# Altium PCB ESP_layout_3.1_saved.PcbDoc
Units mil, origin at the board's own origin, x right, y up, seen from the top; angles counter-clockwise.
Board outline 3400 x 3000 mil, 4 copper layers (SIG1, GND_PLANE, PWR, SIG2), stack 60.456 mil thick; 43 components, 28 nets, 185 pads, 11 vias.
Unrouted connection lines stored in the file: 100.
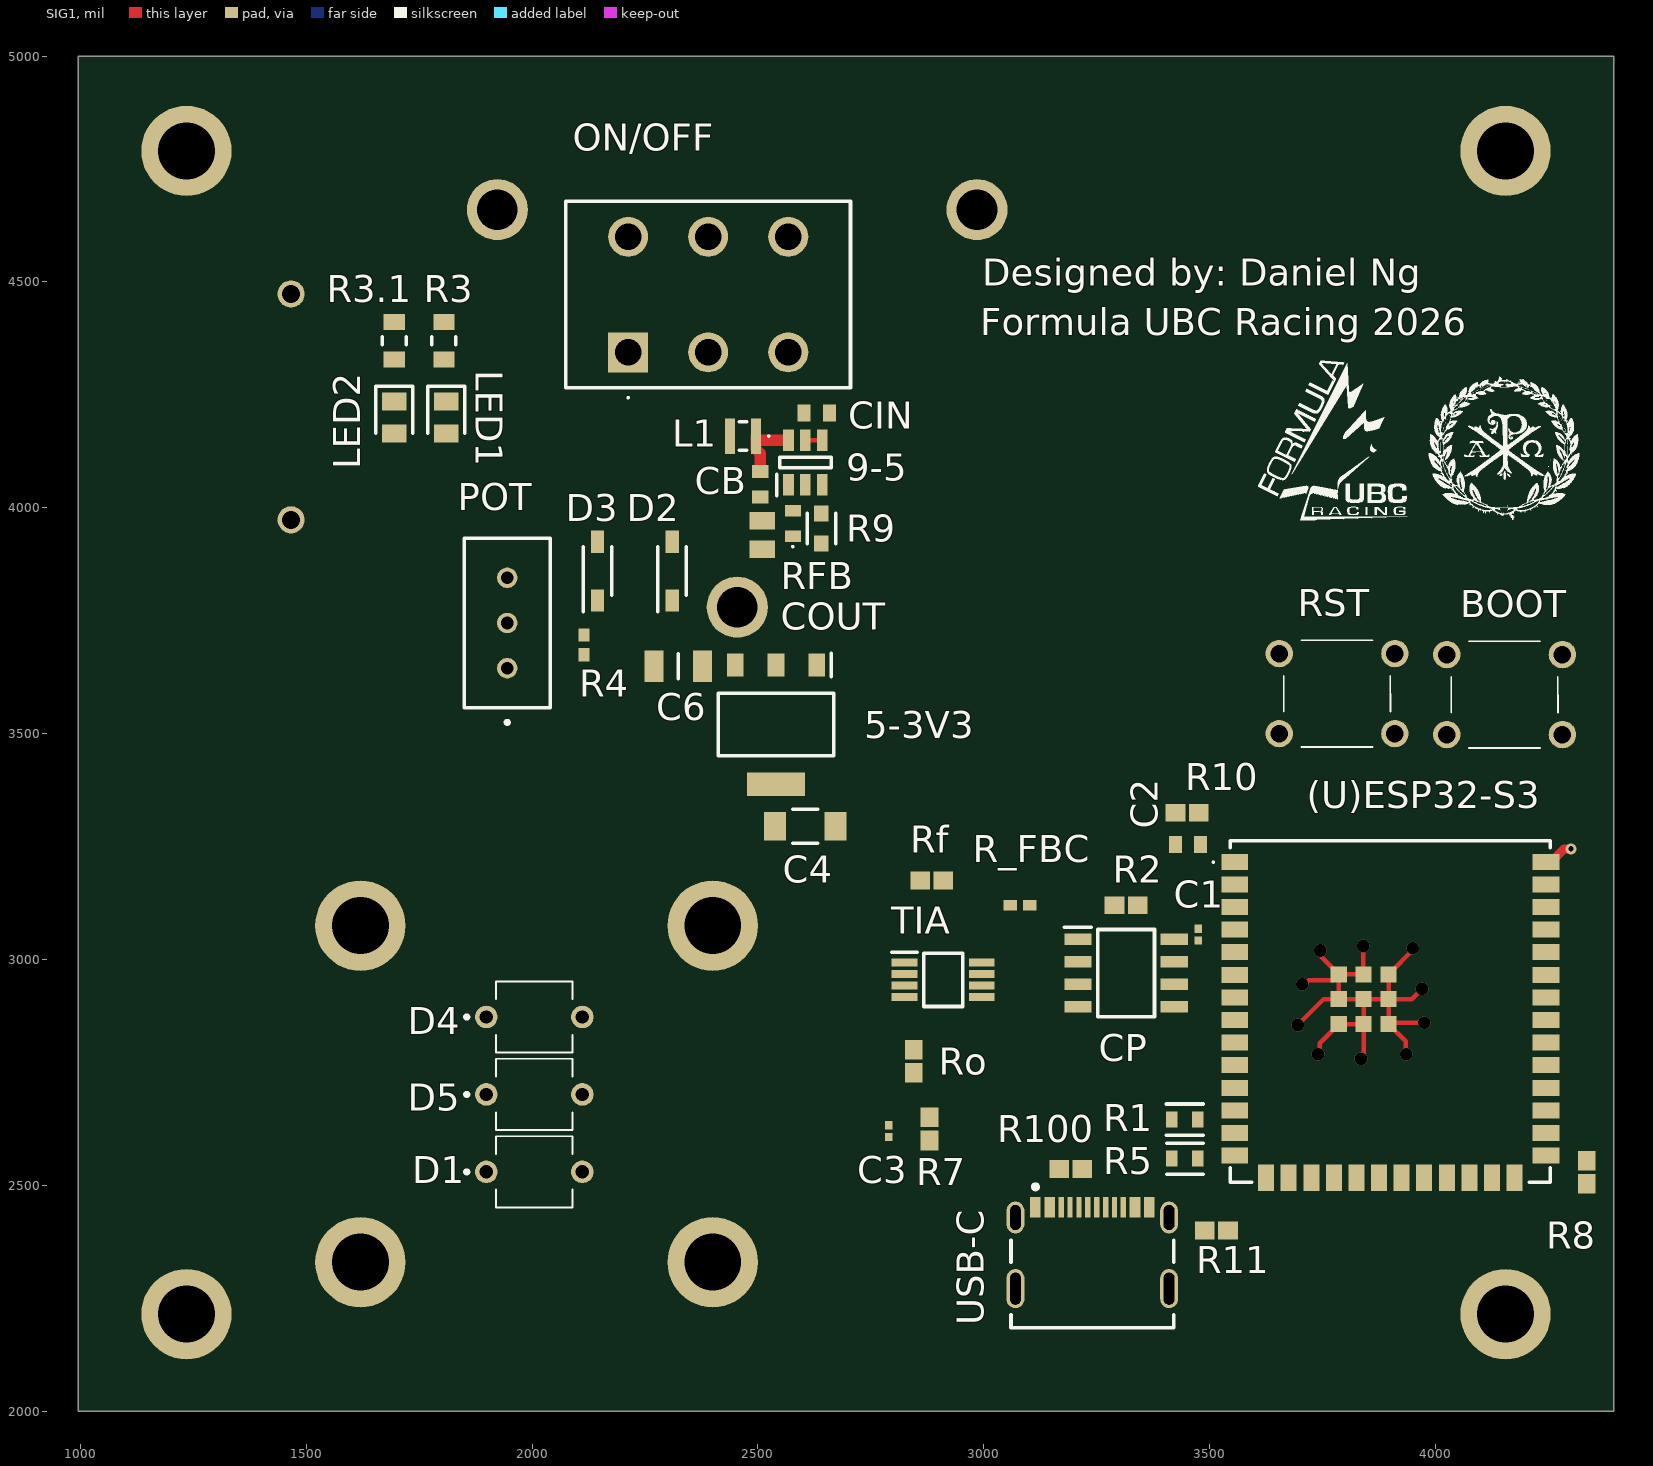
[diagram p0: SIG1 view]
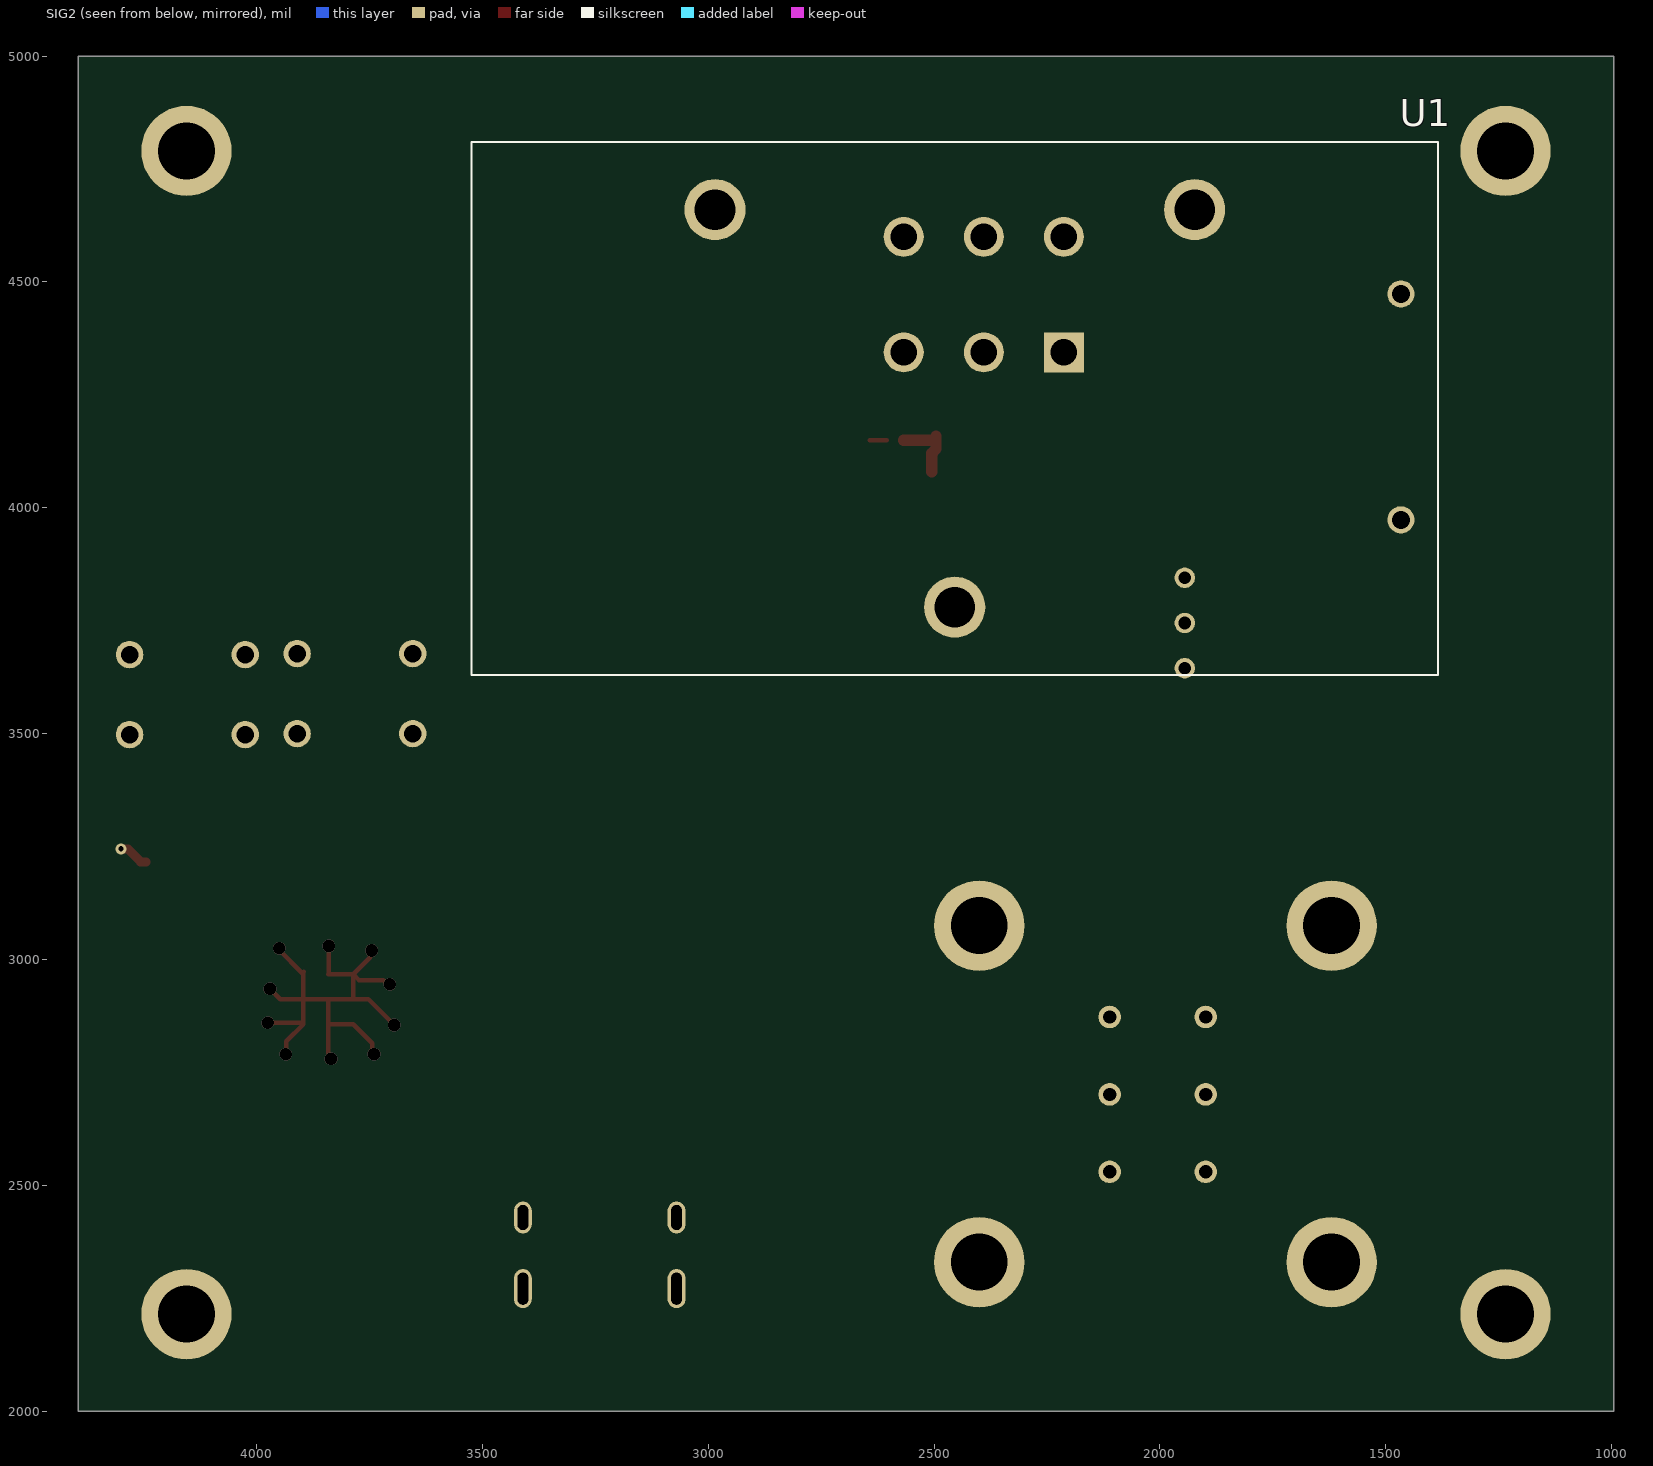
[diagram p1: SIG2 view, seen from below]
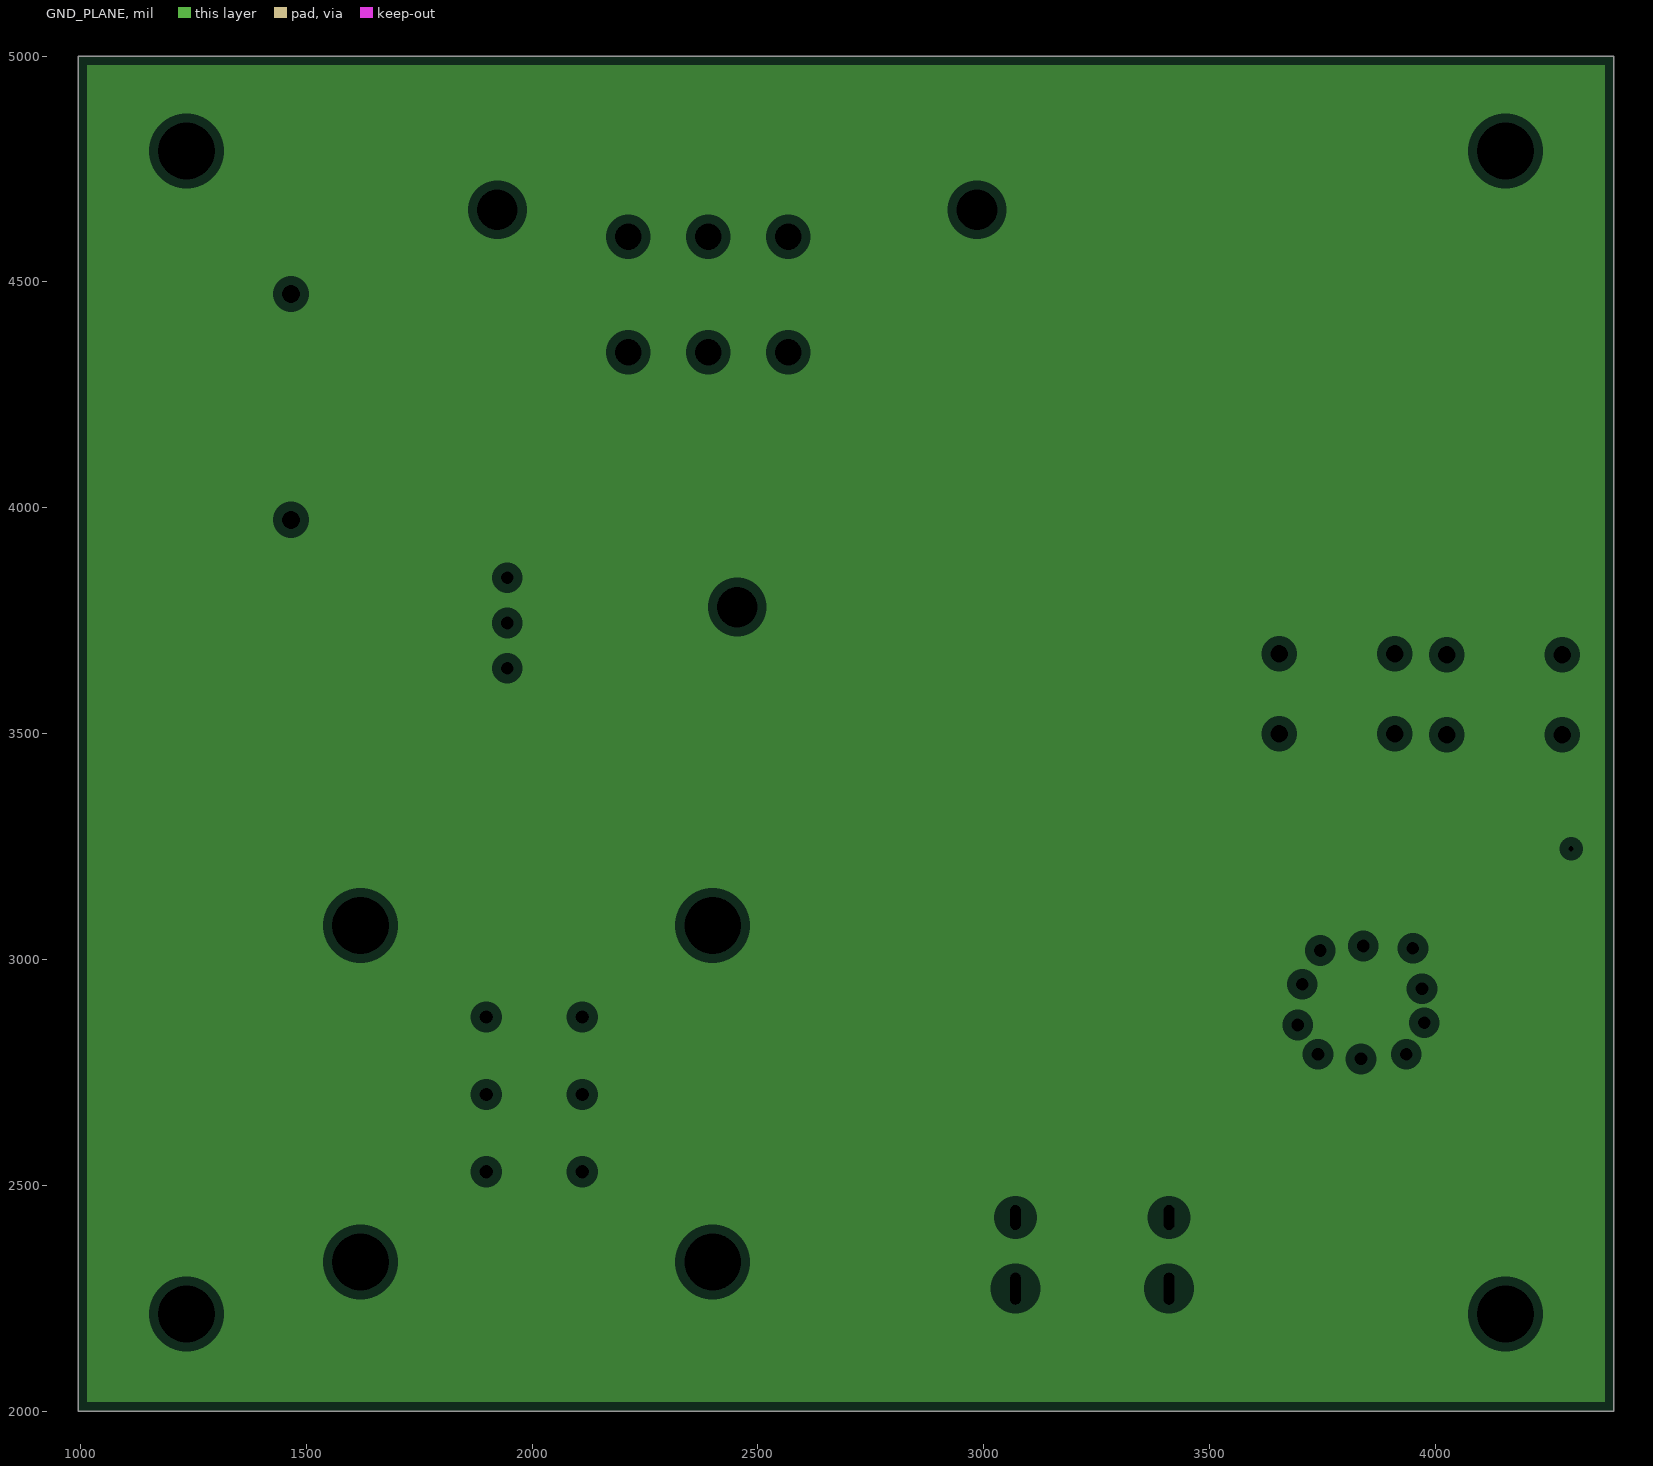
[diagram p2: GND_PLANE, clearances drawn from the general rule]
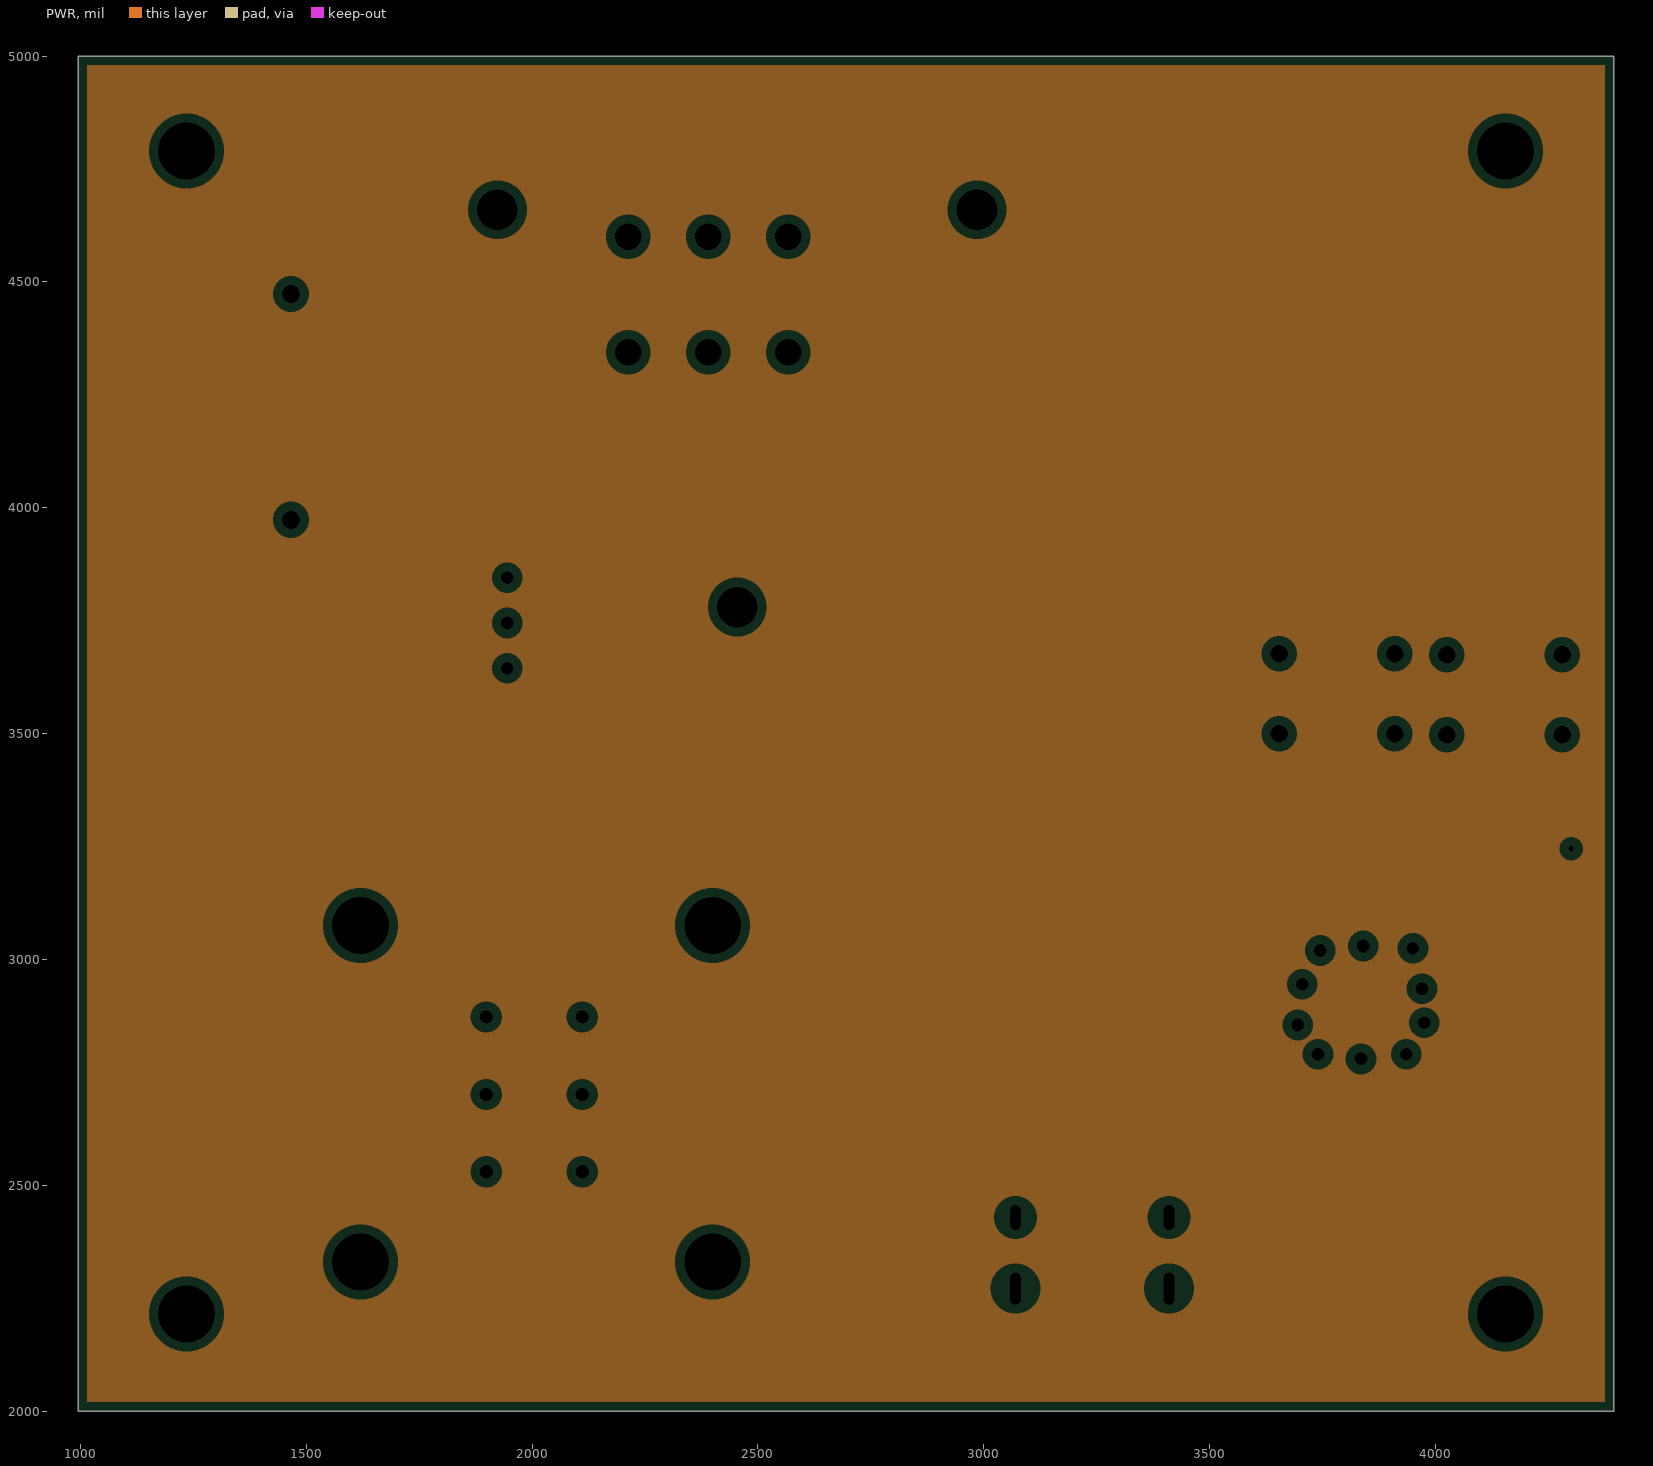
[diagram p3: PWR, clearances drawn from the general rule]

## Layer stack, top to bottom
Top Solder: solder mask 0.4, Solder Resist, Dk 3.5
SIG1: signal copper 1.4
Dielectric 2: prepreg 4.2, PP-006, Dk 4.1
GND_PLANE: plane copper 1.378, net GND
Dielectric 1: core 46.5, FR-4, Dk 4.8
PWR: plane copper 1.378, net 3V3
Dielectric 3: prepreg 4.2, PP-006, Dk 4.1
SIG2: signal copper 1.4
Bottom Solder: solder mask 0.4, Solder Resist, Dk 3.5

## Board outline
995,2000 4395,2000 4395,5000 995,5000

## Design rules (kind name [scope] priority, off if disabled: settings)
Clearance [All] p1: gap=6 ignorepadtopadclearanceinfootprint=FALSE
DiffPairsRouting [All] p1: maxlimit=10 minlimit=10 mostfreqgap=10 toplayer_minwidth=15 toplayer_maxwidth=15 toplayer_prefwidth=15 bottomlayer_minwidth=15 bottomlayer_maxwidth=15 bottomlayer_prefwidth=15 maxuncoupledlength=500
PlaneClearance [All] p1: clearance=20
PlaneConnect [All] p1: planeconnectstyle=Relief reliefexpansion=20 reliefentries=4 reliefconductorwidth=10 reliefairgap=10
PolygonConnect [All] p1: connectstyle=Relief reliefconductorwidth=10 reliefentries=4 polygonreliefangle="90 Angle" airgapwidth=10
RoutingVias [All] p1: holewidth=28 width=50 viastyle="Through Hole" minholewidth=28 minwidth=50 maxholewidth=28 maxwidth=50
SolderMaskExpansion [All] p1: expansion=0 istentingtop=FALSE
SupplyNets "Schematic Supply Nets_7" [InNet('3V3')] p1: voltage=0.000
SupplyNets "Schematic Supply Nets_6" [InNet('9V')] p2: voltage=0.000
SupplyNets "Schematic Supply Nets_5" [InNet('5V_USB')] p3: voltage=0.000
SupplyNets "Schematic Supply Nets_4" [InNet('GND')] p4: voltage=0.000
SupplyNets "Schematic Supply Nets_2" [InNet('5V')] p5: voltage=0.000
SupplyNets "Schematic Supply Nets_1" [InNet('5V_BUCK')] p6: voltage=0.000
SupplyNets "Schematic Supply Nets" [InNet('VBAT')] p7: voltage=0.000
Width [All] p1: maxlimit=10 minlimit=10 preferedwidth=10
27 further rules are at their usual default settings.

## Classes and differential pairs
component class Receiver: C1 C3 CP D1 D4 D5 POT R2 R4 R7 R_FBC Rf Ro TIA
component class Power: 5-3V3 9-5 C4 C6 CB CIN COUT D2 D3 L1 ON/OFF R9 RFB U1
component class ESP: (U)ESP32-S3 BOOT C2 LED1 LED2 R1 R3 R3.1 R5 R8 R10 R11 R100 RST USB-C
differential pair USB: +USB_P -USB_N

## Components (designator, comment, footprint, x,y, rotation, side; value= is the part's Value field where it differs from the comment)
5-3V3 "AMS1117-3.3" SOT229P700X180-4N 2540,3520 r270 top (schematic designator 1)
9-5 "LMR50410Y5FQDBVRQ1" SOT95P280X145-6N 2605,4100 r90 top
(U)ESP32-S3 "ESP32-S3-WROOM-1U-N8R8" ESP32S3WROOM1UN8R8 3900,2885 r0 top
BOOT "BOOT" 18259106 4280.91,3497.83 r180 top
C1 "0.1uF" CAPC0603X33N 3475,3055 r90 top
C2 "1uF" CAPC1608X90N 3452.01,3254.48 r180 top
C3 "0.1uF" CAPC0603X33N 2790,2620 r90 top
C4 "22uF" FP-1206-L_3_2_0_3-W_1_6_0-MFG 2605,3295 r0 top
C6 "10uF" CAPC3216X180N 2323.43,3649.44 r0 top
CB "0.1uF" CAPC1608X90N 2505,4052.05 r90 top
CIN "2.2uF" CAPC1608X90N 2630,4210 r0 top
COUT "10uF" CAPC2012X140N 2510,3940 r270 top
CP "LM393DR2GH" SOIC127P600X175-8N 3315,2970 r0 top
D1 "BPW34" BPW34 2005,2530 r0 top
D2 "B5819W" SOD3716X125N 2310,3860 r90 top
D3 "B5819W" SOD3716X125N 2145,3860 r90 top
D4 "BPW34" BPW34 2005,2872.83 r0 top
D5 "BPW34" BPW34 2005,2701.42 r0 top
L1 "4.7uH" 621767970 2467.05,4158.75 r180 top
LED1 "LTST-C170GKT" LEDC2012X120N 1810,4200 r270 top
LED2 "LTST-C170GKT" LEDC2012X120N 1695,4200 r270 top
ON/OFF "SLW-1678105-6A-N-D" SLW16781056AND 2212.83,4344.09 r0 top
POT "3296W-1-104LF" 3296W1503LF 1945,3645 r270 top
R1 "ERJ-3GEY0R00V" FP-ERJ-3GEY0R00V-MFG 3445,2645.75 r0 top value=0Ω
R2 "10k" RESC1608X55N 3315,3120 r0 top
R3 "330R" FP-AC0805-MFG 1805,4370 r270 top value=330Ω
R3.1 "330R" FP-AC0805-MFG 1695,4370 r270 top value=330Ω
R4 "100k" RESC1005X40N 2115,3696.65 r270 top
R5 "ERJ-3GEY0R00V" FP-ERJ-3GEY0R00V-MFG 3445.12,2558.98 r0 top value=0Ω
R7 "10k" RESC1608X55N 2880,2625 r90 top
R8 "10kΩ" RESC1608X55N 4335,2529.41 r270 top
R9 "22.1kΩ" FP-RT0603-MFG 2640.32,3954.17 r90 top value=22.1KΩ
R10 "10kΩ" RESC1608X55N 3450,3325 r180 top
R11 "5.1kΩ" RESC1608X55N 3515,2400 r0 top
R100 "5.1kΩ" RESC1608X55N 3192.39,2536.3 r180 top
R_FBC "100k" RESC1005X40N 3080,3120 r180 top
Rf "10k" RESC1608X55N 2885,3175 r0 top
RFB "88.7kΩ" ERA3AEB101V 2577.17,3965.18 r90 top
Ro "10k" RESC1608X55N 2845,2775 r90 top
RST "RST" 18259106 3654.09,3677.17 r0 top
TIA "OPA380AIDGKR" SOP65P490X110-8N 2910,2955 r0 top
U1 "BH9VPC" BH9VPC 2454.29,4220.04 r180 bottom locked
USB-C "217179-0001" FP-2171790001-MFG 3240.21,2316.65 r0 top

## Footprints (in the part's own frame and the unit in brackets; to place one, negate y for a bottom-side part, rotate by r counter-clockwise, add the part's x,y. Pads: shape width x height; smd on the part's side, far side on the other; paste and mask are expansions set on the pad)
3296W1503LF [mm]
  round 1.15 hole 0.71: 1(0,0) 2(-2.54,0) 3(-5.08,0)
  silkscreen extent -7.3,-2.42 3.15,2.41, body extent -7.3,-2.41 2.22,2.41, height 11.54
18259106 [mm]
  round 1.54 hole 0.99: 1(0,0) 2(6.5,0) 3(0,-4.5) 4(6.5,-4.5)
  silkscreen extent 0.25,-5.25 6.25,0.75, body extent -0.65,-5.25 7.15,0.74, height 5.64
621767970 [mm]
  rect 0.55x2 smd: 1(-0.725,0) 2(0.725,0)
  silkscreen extent -1.5,-0.8 0.2,0.8, body extent -1.05,-0.8 1.05,0.8, height 1.1
BH9VPC [mm]
  round 1.524 hole 1.016: 1(25.09,6.435) 2(25.09,-6.265)
  round 3.435 hole 2.29: 3(13.49,11.175) 4(-13.48,11.175) 5(0,-11.175)
  silkscreen extent -27.18,-14.99 27.17,14.98, body extent -27.18,-14.99 27.18,14.99, height 20.1
BPW34 [mm]
  round 1.269 hole 0.74: 1(-2.7,0) 2(2.7,0)
  silkscreen extent -3.9,-2 2.15,2, body extent -2.77,-1.99 2.89,1.99, height 2.34
CAPC0603X33N [mm]
  rect 0.46x0.42 smd: 1(-0.33,0) 2(0.33,0)
  body extent -0.3,-0.15 0.3,0.15, height 0.33
CAPC1608X90N [mm]
  rect 0.73x0.94 smd: 1(-0.71,0) 2(0.71,0)
  body extent -0.8,-0.4 0.8,0.4, height 0.9
CAPC2012X140N [mm]
  rect 0.98x1.43 smd: 1(-0.8,0) 2(0.8,0)
  body extent -1,-0.63 1,0.63, height 1.4
CAPC3216X180N [mm]
  rect 1.07x1.78 smd: 1(-1.36,0) 2(1.36,0)
  silkscreen extent 0,-0.7 0,0.7, body extent -1.6,-0.8 1.6,0.8, height 1.8
ERA3AEB101V [mm]
  rect 0.65x0.9 smd: 1(-0.725,0) 2(0.725,0)
  silkscreen extent -1.35,-0.05 -1.25,0.05, body extent -0.8,-0.4 0.8,0.4, height 0.45
ESP32S3WROOM1UN8R8 [mm]
  rect 1.5x0.9 smd: 1(-8.75,8.41) 2(-8.75,7.14) 3(-8.75,5.87) 4(-8.75,4.6) 5(-8.75,3.33) 6(-8.75,2.06) 7(-8.75,0.79) 8(-8.75,-0.48) 9(-8.75,-1.75) 10(-8.75,-3.02) 11(-8.75,-4.29) 12(-8.75,-5.56) 13(-8.75,-6.83) 14(-8.75,-8.1) 27(8.75,-8.1) 28(8.75,-6.83) 29(8.75,-5.56) 30(8.75,-4.29) 31(8.75,-3.02) 32(8.75,-1.75) 33(8.75,-0.48) 34(8.75,0.79) 35(8.75,2.06) 36(8.75,3.33) 37(8.75,4.6) 38(8.75,5.87) 39(8.75,7.14) 40(8.75,8.41)
  rect 0.9x1.5 smd: 15(-6.985,-9.35) 16(-5.715,-9.35) 17(-4.445,-9.35) 18(-3.175,-9.35) 19(-1.905,-9.35) 20(-0.635,-9.35) 21(0.635,-9.35) 22(1.905,-9.35) 23(3.175,-9.35) 24(4.445,-9.35) 25(5.715,-9.35) 26(6.985,-9.35)
  rect 0.9x0.9 smd: 41(-1.5,0.69) 42(-2.9,2.09) 43(-2.9,0.69) 44(-2.9,-0.71) 45(-1.5,-0.71) 46(-0.1,-0.71) 47(-0.1,0.69) 48(-0.1,2.09) 49(-1.5,2.09)
  silkscreen extent -10,-9.6 9,9.6, body extent -9.01,-9.61 9.01,9.6, height 3.25
FP-1206-L_3_2_0_3-W_1_6_0-MFG [mm]
  rect 1.25x1.6 smd paste+0 mask+0: 1(-1.7,0) 2(1.7,0)
  silkscreen extent -0.7,-0.95 0.7,0.95, body extent -2.42,-1.05 2.42,1.05, height 0.25
FP-2171790001-MFG [mm]
  rrect100% 1x1.8 hole 1.4 slot 0.6 at 0 deg paste-2539.97 mask+0: 1(-4.32,2.85) 2(4.32,2.85)
  rrect100% 1x2.2 hole 1.8 slot 0.6 at 0 deg paste-2539.97 mask+0: 3(-4.32,-1.15) 4(4.32,-1.15)
  rect 0.6x1.15 smd paste+0 mask+0: A1-B12(-3.2,3.425) A4-B9(-2.4,3.425) B1-A12(3.2,3.425) B4-A9(2.4,3.425)
  rect 0.3x1.15 smd paste+0 mask+0: A5(-1.25,3.425) A6(-0.25,3.425) A7(0.25,3.425) A8(1.25,3.425) B5(1.75,3.425) B6(0.75,3.425) B7(-0.75,3.425) B8(-1.75,3.425)
  silkscreen extent -4.57,-3.35 4.57,4.7, body extent -4.92,-3.45 4.92,4.1, height 0.25
FP-AC0805-MFG [mm]
  rect 0.9x1.2 smd paste+0 mask+0: 1(-1.05,0) 2(1.05,0)
  silkscreen extent -0.22,-0.67 0.22,0.67, body extent -1.6,-0.77 1.6,0.77, height 0.25
FP-ERJ-3GEY0R00V-MFG [mm]
  rect 0.65x0.9 smd paste+0 mask+0: 1(-0.725,0) 2(0.725,0)
  silkscreen extent -1.03,-0.88 1.03,0.87, body extent -1.15,-0.58 1.15,0.58, height 0.25
FP-RT0603-MFG [mm]
  rect 0.9x0.8 smd paste+0 mask+0: 1(-0.85,0) 2(0.85,0)
  silkscreen extent -0.85,-0.81 0.86,0.8, body extent -1.4,-0.55 1.4,0.55, height 0.25
LEDC2012X120N [mm]
  rect 1x1.4 smd: 1(-0.9,0) 2(0.9,0)
  silkscreen extent -1.75,-1.05 0.9,1.05, body extent -1.03,-0.63 0.97,0.63, height 1.2
RESC1005X40N [mm]
  rect 0.75x0.6 smd: 1(-0.55,0) 2(0.55,0)
  body extent -0.5,-0.25 0.5,0.25, height 0.4
RESC1608X55N [mm]
  rect 1.1x1 smd: 1(-0.65,0) 2(0.65,0)
  body extent -0.8,-0.4 0.8,0.4, height 0.55
SLW16781056AND [mm]
  rect 2.25x2.25 hole 1.5: 1(0,0)
  round 2.25 hole 1.5: 2(4.5,0) 3(9,0) 4(9,6.5) 5(4.5,6.5) 6(0,6.5)
  silkscreen extent -3.5,-2.6 12.5,8.5, body extent -3.43,-1.52 12.57,8.98, height 13.82
SOD3716X125N [mm]
  rect 1.25x0.75 smd: 1(-1.65,0) 2(1.65,0)
  silkscreen extent -2.27,-0.8 1.35,0.8, body extent -1.85,-0.8 1.85,0.8, height 1.25
SOIC127P600X175-8N [mm]
  rect 1.525x0.65 smd: 1(-2.712,1.905) 2(-2.712,0.635) 3(-2.712,-0.635) 4(-2.712,-1.905) 5(2.712,-1.905) 6(2.712,-0.635) 7(2.712,0.635) 8(2.712,1.905)
  silkscreen extent -3.47,-2.45 1.6,2.58, body extent -3,-2.45 3,2.45, height 1.75
SOP65P490X110-8N [mm]
  rect 1.45x0.45 smd: 1(-2.175,0.975) 2(-2.175,0.325) 3(-2.175,-0.325) 4(-2.175,-0.975) 5(2.175,-0.975) 6(2.175,-0.325) 7(2.175,0.325) 8(2.175,0.975)
  silkscreen extent -2.9,-1.5 1.1,1.55, body extent -2.45,-1.5 2.45,1.5, height 1.1
SOT95P280X145-6N [mm]
  rect 1.2x0.6 smd: 1(-1.25,0.95) 2(-1.25,0) 3(-1.25,-0.95) 4(1.25,-0.95) 5(1.25,0) 6(1.25,0.95)
  silkscreen extent -1.85,-1.45 0.3,1.6, body extent -1.4,-1.45 1.4,1.45, height 1.2
SOT229P700X180-4N [mm]
  rect 1.3x0.95 smd: 1(-3.35,2.29) 2(-3.35,0) 3(-3.35,-2.29)
  rect 1.3x3.25 smd: 4(3.35,0)
  silkscreen extent -4,-3.25 1.75,3.25, body extent -3.5,-3.25 3.5,3.25, height 1.8

## Part data
5-3V3: "Integrated Circuit", Manufacturer_Name="Advanced Monolithic Systems", Datasheet Link=http://www.advanced-monolithic.com/pdf/ds1117.pdf, Height=1.8mm, Manufacturer_Part_Number=AMS1117-3.3
9-5: "Integrated Circuit", Manufacturer_Name="Texas Instruments", Mouser Part Number=595-R50410Y5FQDBVRQ1, Arrow Part Number=LMR50410Y5FQDBVRQ1, Arrow Price/Stock=https://www.arrow.com/en/products/lmr50410y5fqdbvrq1/texas-instruments?utm_currency=USD&region=nac, Datasheet Link=https://www.ti.com/lit/ds/symlink/lmr50410-q1.pdf, Height=1.45mm, Manufacturer_Part_Number=LMR50410Y5FQDBVRQ1, Mouser Price/Stock=https://www.mouser.co.uk/ProductDetail/Texas-Instruments/LMR50410Y5FQDBVRQ1?qs=81r%252BiQLm7BR57cLsTbTr9w%3D%3D
(U)ESP32-S3: "Integrated Circuit", Manufacturer_Name="Espressif Systems", Mouser Part Number=356-ESP32S3WRM1UN8R8, Datasheet Link=https://www.espressif.com/sites/default/files/documentation/esp32-s3-wroom-1_wroom-1u_datasheet_en.pdf, Height=3.35mm, Manufacturer_Part_Number=ESP32-S3-WROOM-1U-N8R8, Mouser Price/Stock=https://www.mouser.co.uk/ProductDetail/Espressif-Systems/ESP32-S3-WROOM-1U-N8R8?qs=Li%252BoUPsLEnvOglIa3CypaQ%3D%3D
BOOT RST: library part 1825910-6, "Switch", Manufacturer_Name="TE Connectivity", Mouser Part Number=650-1825910-6, Arrow Part Number=1825910-6, Arrow Price/Stock=https://www.arrow.com/en/products/1825910-6/te-connectivity?utm_currency=USD&region=europe, Datasheet Link=https://www.te.com/commerce/DocumentDelivery/DDEController?Action=srchrtrv&DocNm=1308111-1_SWITCHES_CORE_PROGRAM_CATALOG&DocType=Catalog%20Section&DocLang=English&PartCntxt=1825910-6&DocFormat=pdf, Height=5.3mm, Manufacturer_Part_Number=1825910-6, Mouser Price/Stock=https://www.mouser.co.uk/ProductDetail/TE-Connectivity/1825910-6?qs=A6cQTCBcXncisYDS1KbpGA%3D%3D
C1 C3: library part GRM033C71C104KE14D, "Capacitor", Manufacturer_Name="Murata Electronics", Mouser Part Number=81-GRM33C71C104KE14D, Arrow Part Number=GRM033C71C104KE14D, Arrow Price/Stock=https://www.arrow.com/en/products/grm033c71c104ke14d/murata-manufacturing?region=nac, Datasheet Link=https://search.murata.co.jp/Ceramy/image/img/A01X/G101/ENG/GRM033C71C104KE14-01A.pdf, Height=0.33mm, Manufacturer_Part_Number=GRM033C71C104KE14D, Mouser Price/Stock=https://www.mouser.co.uk/ProductDetail/Murata-Electronics/GRM033C71C104KE14D?qs=P%2FC4Eoq9CDzkjc0H6wJP9A%3D%3D
C2: library part CL10B105KP8NNNC, "Capacitor", Manufacturer_Name=SAMSUNG, Mouser Part Number=187-CL10B105KP8NNNC, Arrow Part Number=CL10B105KP8NNNC, Arrow Price/Stock=https://www.arrow.com/en/products/cl10b105kp8nnnc/samsung-electro-mechanics?utm_currency=USD&region=nac, Datasheet Link=https://media.digikey.com/pdf/Data%20Sheets/Samsung%20PDFs/CL_Series_MLCC_ds.pdf, Height=0.9mm, Manufacturer_Part_Number=CL10B105KP8NNNC, Mouser Price/Stock=https://www.mouser.co.uk/ProductDetail/Samsung-Electro-Mechanics/CL10B105KP8NNNC?qs=X6jEic%2FHinD9krOsbkFZow%3D%3D
C4: library part CMP-14477-000100-2, "None", Case Code (Imperial)=1206, Case Code (Metric)=3216, Dielectric=X5R, Max Operating Temperature=85°C, Min Operating Temperature=-55°C, Package Quantity=2000, Resistor Type=Ceramic, Tolerance=20%, Voltage Rating=25V, Capacitance=22uF, Case/Package=1206, Construction=Flat, Halogen Free="Halogen Free", Height=1.6mm, Length=3.2mm, Mount="Surface Mount", Packaging="Tape and Reel", RoHS Compliant=Yes, Series=M, Termination=SMD/SMT, Thickness=0.075inch, Voltage Rating (DC)=25V, Weight=0.000571oz, Width=0.063inch
C6: library part CL31B106KAHNNNE, "Capacitor", Manufacturer_Name=SAMSUNG, Mouser Part Number=187-CL31B106KAHNNNE, Arrow Part Number=CL31B106KAHNNNE, Arrow Price/Stock=https://www.arrow.com/en/products/cl31b106kahnnne/samsung-electro-mechanics?utm_currency=USD&region=europe, Datasheet Link=https://datasheet.datasheetarchive.com/originals/distributors/Datasheets_SAMA/d94547340e0e9d2be5f415b64e4e2f0a.pdf, Height=1.8mm, Manufacturer_Part_Number=CL31B106KAHNNNE, Mouser Price/Stock=https://www.mouser.co.uk/ProductDetail/Samsung-Electro-Mechanics/CL31B106KAHNNNE?qs=349EhDEZ59r5EZhnLOTsYA%3D%3D
CB: library part CC0603KRX7R7BB104, "Capacitor", Manufacturer_Name=YAGEO, Mouser Part Number=603-CC603KRX7R7BB104, Arrow Part Number=CC0603KRX7R7BB104, Arrow Price/Stock=https://www.arrow.com/en/products/cc0603krx7r7bb104/yageo?utm_currency=USD&region=europe, Datasheet Link=https://www.yageo.com/en/Chart/Download/pdf/CC0603KRX7R7BB104, Height=0.9mm, Manufacturer_Part_Number=CC0603KRX7R7BB104, Mouser Price/Stock=https://www.mouser.co.uk/ProductDetail/YAGEO/CC0603KRX7R7BB104?qs=AgBp2OyFlx8KPmNTlFoWXA%3D%3D
CIN: library part CL10A225KO8NNNC, "Capacitor", Manufacturer_Name=SAMSUNG, Mouser Part Number=187-CL10A225KO8NNNC, Arrow Part Number=CL10A225KO8NNNC, Arrow Price/Stock=https://www.arrow.com/en/products/cl10a225ko8nnnc/samsung-electro-mechanics?region=europe, Datasheet Link=https://lcsc.componentsearchengine.com/Datasheets/2/CL10A225KO8NNNC.pdf, Height=0.9mm, Manufacturer_Part_Number=CL10A225KO8NNNC, Mouser Price/Stock=https://www.mouser.co.uk/ProductDetail/Samsung-Electro-Mechanics/CL10A225KO8NNNC?qs=hqM3L16%252BxlecoJxUp5hKOw%3D%3D
COUT: library part CL21B106KOQNNNE, "Capacitor", Manufacturer_Name=SAMSUNG, Mouser Part Number=187-CL21B106KOQNNNE, Arrow Part Number=CL21B106KOQNNNE, Arrow Price/Stock=https://www.arrow.com/en/products/cl21b106koqnnne/samsung-electro-mechanics?utm_currency=USD&region=europe, Datasheet Link=https://datasheet.datasheetarchive.com/originals/distributors/Datasheets_SAMA/a6a503886ec2e900bbf4e5d6e2f8e8b0.pdf, Height=1.4mm, Manufacturer_Part_Number=CL21B106KOQNNNE, Mouser Price/Stock=https://www.mouser.co.uk/ProductDetail/Samsung-Electro-Mechanics/CL21B106KOQNNNE?qs=349EhDEZ59r8qgLddyW2Yw%3D%3D
CP: "Integrated Circuit", Manufacturer_Name=onsemi, Mouser Part Number=863-LM393DR2GH, Arrow Part Number=LM393DR2GH, Arrow Price/Stock=https://www.arrow.com/en/products/lm393dr2gh/on-semiconductor?region=nac, Datasheet Link=https://www.arrow.com/en/products/lm393dr2gh/on-semiconductor, Height=1.75mm, Manufacturer_Part_Number=LM393DR2GH, Mouser Price/Stock=https://www.mouser.co.uk/ProductDetail/onsemi/LM393DR2GH?qs=VZGfJwuufXYqyz8qorfXHA%3D%3D
D1 D4 D5: "Diode", Manufacturer_Name="ams OSRAM", Mouser Part Number=N/A, Arrow Part Number=BPW34, Arrow Price/Stock=https://www.arrow.com/en/products/bpw34/osram-opto-semiconductors?region=europe, Datasheet Link=https://datasheet.datasheetarchive.com/originals/distributors/Datasheets-24/DSA-465527.pdf, Height=2.2mm, Manufacturer_Part_Number=BPW34, Mouser Price/Stock=https://www.mouser.com/Search/Refine.aspx?Keyword=N%2FA
D2 D3: "Diode", Manufacturer_Name="Changjiang Electronics Tech (CJ)", Datasheet Link=https://datasheet.lcsc.com/szlcsc/Changjiang-Electronics-Tech-CJ-B5819W_C8598.pdf, Height=1.25mm, Manufacturer_Part_Number=B5819W
L1: library part 7-2176797-1, "Inductor", Manufacturer_Name="TE Connectivity", Datasheet Link=https://www.te.com/commerce/DocumentDelivery/DDEController?Action=srchrtrv&DocNm=1773151-4&DocType=Data%20Sheet&DocLang=English&DocFormat=pdf&PartCntxt=2176797-45, Height=1mm, Manufacturer_Part_Number=7-2176797-1
LED1 LED2: "LED", Manufacturer_Name=Lite-On, Mouser Part Number=859-LTST-C170GKT, Arrow Part Number=LTST-C170GKT, Arrow Price/Stock=https://www.arrow.com/en/products/ltst-c170gkt/lite-on-technology?utm_currency=USD&region=europe, Datasheet Link=https://mm.digikey.com/Volume0/opasdata/d220001/medias/docus/895/LTST-C170GKT.pdf, Height=1.2mm, Manufacturer_Part_Number=LTST-C170GKT, Mouser Price/Stock=https://www.mouser.co.uk/ProductDetail/LITEON/LTST-C170GKT?qs=%2FSqKn2EfXQSV5aRij3YIfQ%3D%3D
ON/OFF: "Switch", Manufacturer_Name="Same Sky", Mouser Part Number=179-SLW16781056AND, Arrow Part Number=SLW-1678105-6A-N-D, Arrow Price/Stock=https://www.arrow.com/en/products/slw-1678105-6a-n-d/cui-devices?utm_currency=USD&region=nac, Datasheet Link=https://www.sameskydevices.com/product/resource/SLW-1678105-6A-N-D.pdf, Height=14.5mm, Manufacturer_Part_Number=SLW-1678105-6A-N-D, Mouser Price/Stock=https://www.mouser.co.uk/ProductDetail/Same-Sky/SLW-1678105-6A-N-D?qs=IKkN%2F947nfCWfuHPg7jcWw%3D%3D
POT: "Variable Resistor", Manufacturer_Name=Bourns, Mouser Part Number=652-3296W-1-104LF, Arrow Part Number=3296W-1-104LF, Arrow Price/Stock=https://www.arrow.com/en/products/3296w-1-104lf/bourns?utm_currency=USD&region=europe, Datasheet Link=https://datasheet.datasheetarchive.com/originals/distributors/Datasheets-10/DSA-187647.pdf, Height=10.28mm, Manufacturer_Part_Number=3296W-1-104LF, Mouser Price/Stock=https://www.mouser.co.uk/ProductDetail/Bourns/3296W-1-104LF?qs=NxuKWO2Bm4Yv9t2iisRb6w%3D%3D
R1 R5: library part CMP-2000-00700-2, "RES SMD 0 OHM JUMPER 1/10W 0603", Manufacturer=Panasonic, Package=0603, Power Rating=0.1W, Resistance=0Ω, Temperature="-55°C to +155°C", Temperature Coefficient=-100/+600ppm/°C, Temperature Range High=+155°C, Temperature Range Low=-55°C, Tolerance=5%, Voltage Rating=75V, Automotive=Yes, Automotive Grade="Grade 0", Category=Res, ComponentLink2Description=Datasheet, ComponentLink2URL=https://industrial.panasonic.com/cdbs/www-data/pdf/RDA0000/AOA0000C301.pdf, Composition="Thick Film", Device Class L1="Passive Components", Device Class L2=Resistors, Device Class L3="Chip SMD Resistors", Digikey Description="RES SMD 0 OHM JUMPER 1/10W 0603", Footprint Url=https://industrial.panasonic.com/cdbs/www-data/pdf/RDA0000/DMA0000COL17.pdf, Height=0.55mm, Ipc Land Pattern Name=RESC16080X45, Lead Free=Yes, Manufacturer Part Number=ERJ-3GEY0R00V, Mouser Description="Resistor, Chip Thick Film, 0 Ohm, 0.1w, Resistor, Chip Thick Film, 0 Ohm, 0.1w, 5%", Octopart=https://octopart.com/erj-3gey0r00v-panasonic-55389238, RoHS=TRUE, Series=ERJ
R2 R7 R8 R10 Rf Ro: library part RC0603FR0710KL, "Resistor", Manufacturer_Name=KEMET, Arrow Part Number=RC0603FR0710KL, Arrow Price/Stock=https://www.arrow.com/en/products/rc0603fr-0710kl/yageo, Datasheet Link=http://www.yageo.com/documents/recent/PYu-RC0603_51_RoHS_L_v5.pdf, Height=0.55mm, Manufacturer_Part_Number=RC0603FR0710KL
R3 R3.1: library part CMP-03412-037341-1, "RES SMD 330 OHM 1% 1/8W 0805", Manufacturer=Yageo, Manufacturer Part Number=AC0805FR-07330RL, Package=AC0805, Power Rating=1/8W, Resistance=330Ω, Temperature="-55°C to +155°C", Temperature Range High=+155°C, Temperature Range Low=-55°C, Tolerance=0.01, Voltage Rating=150V, Automotive=Yes, Automotive Grade="Grade 0", Category=Res, ComponentLink2Description=Datasheet, ComponentLink2URL=http://www.yageo.com/documents/recent/PYu-AC_51_RoHS_L_6.pdf, Composition="Thick Film", Device Class L1="Passive Components", Device Class L2=Resistors, Device Class L3="Chip SMD Resistors", Digikey Description="RES SMD 330 OHM 1% 1/8W 0805", Footprint Url=http://www.yageo.com/exep/pages/download/literatures/PYu-R_Mount_10.pdf, Height=0.6mm, Ipc Land Pattern Name=RESC200125X50, Lead Free=Yes, Mouser Description="Thick Film Resistors - SMD 1/8W 330ohm 1% AEC-Q200", Octopart=https://octopart.com/ac0805fr-07330rl-yageo-51059920, RoHS=TRUE, Series=AC
R4 R_FBC: library part R0402_1%_100_K__RC0402FR-07100KL_, "Resistor", Manufacturer_Name=YAGEO, Manufacturer_Part_Number="R0402 1% 100 K (RC0402FR-07100KL)", Datasheet Link=https://www.yageo.com/upload/media/product/products/datasheet/rchip/PYu-RC_Group_51_RoHS_L_12.pdf, Height=0.4mm
R9: library part CMP-2000-04404-2, "RES 22.1K OHM 1/10W .1% SMD 0603", Manufacturer=Yageo, Manufacturer Part Number=RT0603BRD0722K1L, Package=RT0603, Power Rating=0.1W, Resistance=22.1KΩ, Temperature="-55°C to +155°C", Temperature Coefficient="25 ppm/°C", Temperature Range High=+155°C, Temperature Range Low=-55°C, Tolerance=0.001, Voltage Rating=75V, Automotive=No, Category=Res, ComponentLink2Description=Datasheet, ComponentLink2URL=http://www.yageo.com/documents/recent/PYu-RT_1-to-0.01_RoHS_L_9.pdf, Composition="Thin Film", Device Class L1="Passive Components", Device Class L2=Resistors, Device Class L3="Chip SMD Resistors", Digikey Description="RES 22.1K OHM 1/10W .1% SMD 0603", Footprint Url=http://www.yageo.com/exep/pages/download/literatures/PYu-R_Mount_10.pdf, Height=0.55mm, Ipc Land Pattern Name=RESC16080X45, Lead Free=Yes, Mouser Description="Res Thin Film 0603 22.1K Ohm 0.1% 1/10W ±25ppm/°C SMD Paper T/R", Octopart=https://octopart.com/rt0603brd0722k1l-yageo-1430878, RoHS=TRUE, Series=RT
R11 R100: library part RC0603FR-075K1L, "Resistor", Manufacturer_Name=KEMET, Mouser Part Number=603-RC0603FR-075K1L, Arrow Part Number=RC0603FR-075K1L, Arrow Price/Stock=https://www.arrow.com/en/products/rc0603fr-075k1l/yageo?region=nac, Datasheet Link=http://www.yageo.com/documents/recent/PYu-RC0603_51_RoHS_L_v5.pdf, Height=0.55mm, Manufacturer_Part_Number=RC0603FR-075K1L, Mouser Price/Stock=https://www.mouser.co.uk/ProductDetail/YAGEO/RC0603FR-075K1L?qs=gt6vzsuosg2jUUwxnI2PJQ%3D%3D
RFB: library part ERA-3AEB8872V, "Resistor", Manufacturer_Name=Panasonic, Mouser Part Number=667-ERA-3AEB8872V, Arrow Part Number=ERA-3AEB8872V, Arrow Price/Stock=https://www.arrow.com/en/products/era-3aeb8872v/panasonic?region=nac, Datasheet Link=https://industrial.panasonic.com/cdbs/www-data/pdf/RDM0000/AOA0000C307.pdf, Height=0.55mm, Manufacturer_Part_Number=ERA-3AEB8872V, Mouser Price/Stock=https://www.mouser.co.uk/ProductDetail/Panasonic/ERA-3AEB8872V?qs=nuXzIS8loXExOdAoV6n39Q%3D%3D
TIA: "Undefined or Miscellaneous", Manufacturer_Name="Texas Instruments", Mouser Part Number=595-OPA380AIDGKR, Arrow Part Number=OPA380AIDGKR, Arrow Price/Stock=https://www.arrow.com/en/products/opa380aidgkr/texas-instruments?utm_currency=USD&region=europe, Datasheet Link=http://www.ti.com/general/docs/suppproductinfo.tsp?distId=26&gotoUrl=http%3A%2F%2Fwww.ti.com%2Flit%2Fgpn%2Fopa380, Height=1.1mm, Manufacturer_Part_Number=OPA380AIDGKR, Mouser Price/Stock=https://www.mouser.co.uk/ProductDetail/Texas-Instruments/OPA380AIDGKR?qs=7nS3%252BbEUL6se7xvHvUhv0w%3D%3D
U1: "Undefined or Miscellaneous", Manufacturer_Name="Memory Protection Devices", Datasheet Link=http://www.memoryprotectiondevices.com/datasheets/BH9VPC-datasheet.pdf, Height=20mm, Manufacturer_Part_Number=BH9VPC
USB-C: library part CMP-04767-000028-2, "CONN RCP USB2.0 TYP C 24P SMD RA", Current Rating=1.25A, Max Operating Temperature=85°C, Min Operating Temperature=-40°C, Voltage Rating=30V, Contact Material="Gold, Nickel", Gender=Receptacle, Height=3.36mm, NexarPartId=117190526, Number of Contacts=16, USB Standard="USB 2.0"

## Free pads (board coordinates)
  round 200 hole 126: MHTR7(1235,2215) MHTR7(1235,4790) MHTR7(1620,2330) MHTR7(1620,3075) MHTR7(2400,2330) MHTR7(2400,3075) MHTR7(4155,2215) MHTR7(4155,4790)

## Via types
v1: diameter 28, hole 28, SIG1 to SIG2, 10 vias
v2: diameter 24, hole 12, SIG1 to SIG2, 1 vias

## Nets (pads, with @x,y where several pads share a name; then routed paths per layer and width w, separated by ;. In a path a pad name is that pad's centre, name@x,y a point inside that pad or via, vN(x,y) a via of type N, cw(c..) or ccw(c..) an arc to the next point about the centre after c; other vN are vias at no path point)
3V3: 5-3V3.2 5-3V3.4 (U)ESP32-S3.2 C1.2 C4.1 CP.8 D1.1 D4.1 D5.1 LED1.2 R2.2 R8.2 R10.2 Ro.2 TIA.7
5V: 5-3V3.3 C6.2 D2.1 D3.1 POT.3
5V_BUCK: COUT.1 D2.2 L1.2 RFB.1
5V_USB: D3.2 USB-C.A4-B9 USB-C.B4-A9
9V: 9-5.4 9-5.5 CIN.1 ON/OFF.3 | length 37.4
  SIG1 w10: 9-5.5 9-5.4
BOOT: (U)ESP32-S3.27 BOOT.1 BOOT.3 R8.1
EN: (U)ESP32-S3.3 C2.1 R10.1 RST.1 RST.3
FB: 9-5.3 R9.2 RFB.2
GND: 5-3V3.1 9-5.2 (U)ESP32-S3.1 (U)ESP32-S3.40 (U)ESP32-S3.41 (U)ESP32-S3.42 (U)ESP32-S3.43 (U)ESP32-S3.44 (U)ESP32-S3.45 (U)ESP32-S3.46 (U)ESP32-S3.47 (U)ESP32-S3.48 (U)ESP32-S3.49 BOOT.2 BOOT.4 C1.1 C2.2 C3.1 C4.2 C6.1 CIN.2 COUT.2 CP.4 CP.5 CP.6 pad.MHTR7@1620,2330 pad.MHTR7@1620,3075 pad.MHTR7@2400,2330 pad.MHTR7@2400,3075 POT.1 R3.1 R3.1.1 R7.1 R9.1 R11.2 R100.2 RST.2 RST.4 TIA.4 U1.2 USB-C.1 USB-C.2 USB-C.3 USB-C.4 USB-C.A1-B12 USB-C.B1-A12 | length 1339.8
  SIG1 w10: v1(3695,2855) 3752.17,2912.17 3785.83,2912.17 ; v1(3705,2945) 3709.87,2945 3719.44,2954.57 3773.11,2954.57 3785.83,2967.28 ; v1(3740,2790) 3743.44,2793.44 3743.44,2814.66 3785.83,2857.05 3840.94,2857.05 ; v1(3745,3020) 3748.44,3016.56 3748.44,3004.67 3785.83,2967.28 ; v1(3835,2780) 3835,2784.87 3840.94,2790.82 3840.94,2857.05 ; v1(3840,3030) 3840,2968.23 3840.94,2967.28 3785.83,2967.28 ; 3895.85,2972.42 3896.06,2972.2 3896.06,2967.28 3896.06,2912.17 ; 3898.52,2969.74 3950,3021.22 v1(3950,3025) ; v1(3935,2790) 3934.11,2790.89 3934.11,2819 3896.06,2857.05 ; v1(3970,2935) 3947.17,2912.17 3896.06,2912.17 ; v1(3975,2860) 3899.02,2860 3896.06,2857.05 ; 3785.83,2912.17 3785.83,2967.28 ; 3785.83,2912.17 3840.94,2912.17 ; 3840.94,2857.05 3840.94,2912.17 ; 3840.94,2912.17 3896.06,2912.17 ; 3896.06,2857.05 3896.06,2912.17
  SIG1 w20: 4244.49,3216.1 4256.3,3216.1 4284.43,3244.23 4299.23,3244.23 v2(4300,3245)
IO4: (U)ESP32-S3.4 LED2.2
Net9-5_1: 9-5.1 CB.1
Net9-5_6: 9-5.6 CB.2 L1.1 | length 157.1
  SIG1 w25: L1.1@2495.59,4155.04 2501.42,4149.21 9-5.6 ; L1.1 2495.59,4130.2 2505,4120.79 CB.2
Net(U)ESP32-S3_13: (U)ESP32-S3.13 R1.2
Net(U)ESP32-S3_14: (U)ESP32-S3.14 R5.2
Net(U)ESP32-S3_17: (U)ESP32-S3.17 CP.1 R2.1 R4.2 R_FBC.2
NetC3_2: C3.2 R7.2 Ro.1 TIA.3
NetCP_2: CP.2 POT.2 R4.1
NetD1_2: D1.2 D4.2 D5.2 Rf.1 TIA.2
NetLED1_1: LED1.1 R3.2
NetLED2_1: LED2.1 R3.1.2
NetR11_1: R11.1 USB-C.B5
NetR100_1: R100.1 USB-C.A5
OSC_IN: (U)ESP32-S3.21
OSC_OUT: (U)ESP32-S3.22
TIA_OUT: CP.3 R_FBC.1 Rf.2 TIA.6
USB_N: R1.1 USB-C.A7 USB-C.B7
USB_P: R5.1 USB-C.A6 USB-C.B6
VBAT: ON/OFF.2 U1.1
pads on no net: (U)ESP32-S3.5 (U)ESP32-S3.6 (U)ESP32-S3.7 (U)ESP32-S3.8 (U)ESP32-S3.9 (U)ESP32-S3.10 (U)ESP32-S3.11 (U)ESP32-S3.12 (U)ESP32-S3.15 (U)ESP32-S3.16 (U)ESP32-S3.18 (U)ESP32-S3.19 (U)ESP32-S3.20 (U)ESP32-S3.23 (U)ESP32-S3.24 (U)ESP32-S3.25 (U)ESP32-S3.26 (U)ESP32-S3.28 (U)ESP32-S3.29 (U)ESP32-S3.30 (U)ESP32-S3.31 (U)ESP32-S3.32 (U)ESP32-S3.33 (U)ESP32-S3.34 (U)ESP32-S3.35 (U)ESP32-S3.36 (U)ESP32-S3.37 (U)ESP32-S3.38 (U)ESP32-S3.39 CP.7 ON/OFF.1 ON/OFF.4 ON/OFF.5 ON/OFF.6 TIA.1 TIA.5 TIA.8 U1.3 U1.4 U1.5 USB-C.A8 USB-C.B8

## Polygon pours and split planes (outlines as drawn)
no net on GND_PLANE (split plane): 4374.9,2020.1 1015.1,2020.1 1015.1,4979.9 4374.9,4979.9
no net on PWR (split plane): 4374.9,2020.1 1015.1,2020.1 1015.1,4979.9 4374.9,4979.9

## Silkscreen, mask and mechanical layers (free items; w line width, h text height)
Top Overlay:
  drawing of 54 lines, arcs and shapes, not listed
  text "Designed by: Daniel Ng" at 2997,4491.99 h60
  text "Formula UBC Racing 2026" at 2992,4381.99 h60